# Altium PCB DRV8801.PcbDoc
Units mm, origin at the board's own origin, x right, y up, seen from the top; angles counter-clockwise.
Board outline 30 x 20 mm, 2 copper layers (Top Layer, Bottom Layer); 12 components, 16 nets, 44 pads, 6 vias.
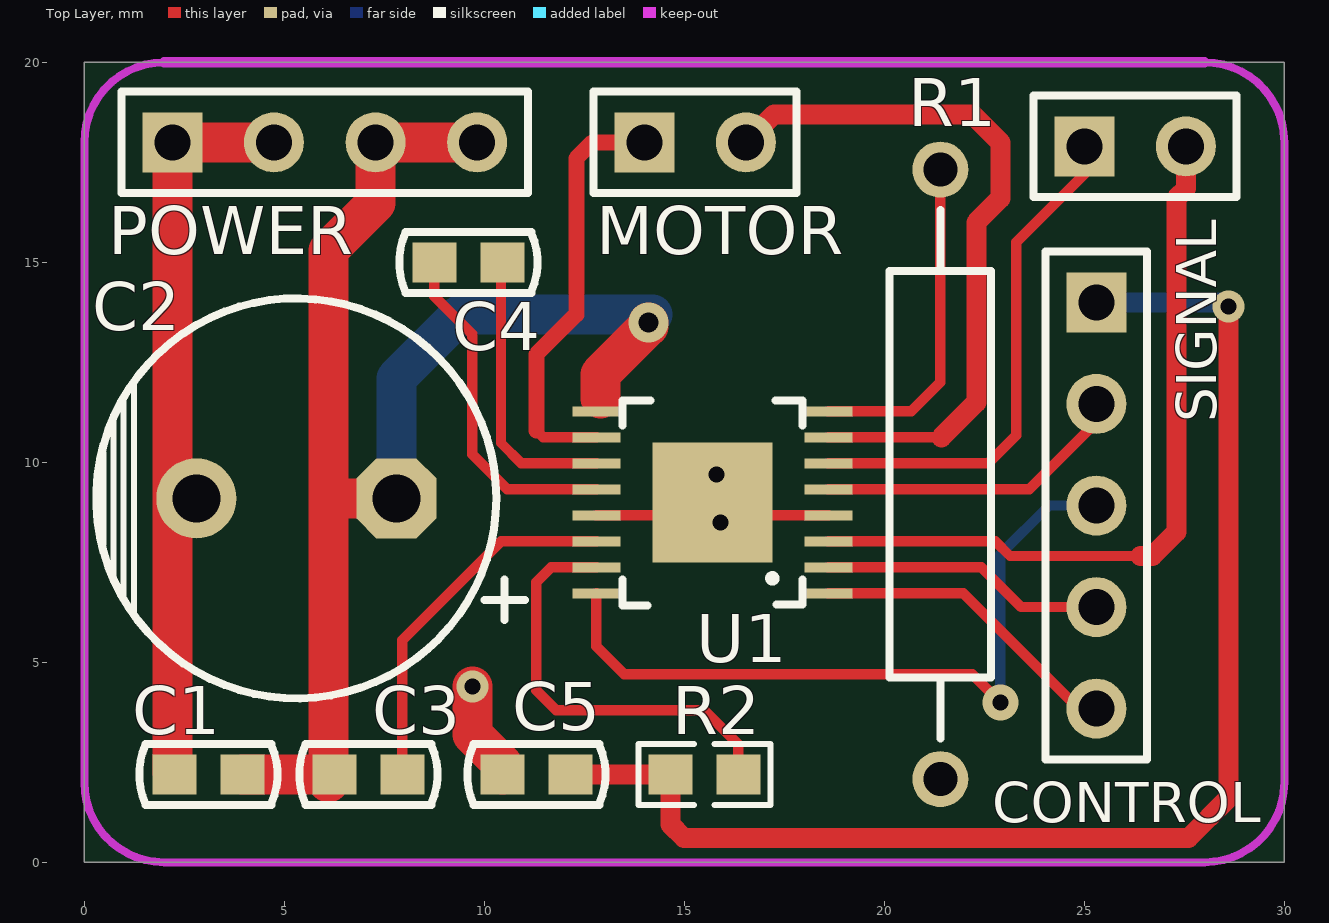
[diagram p0: Top Layer view]
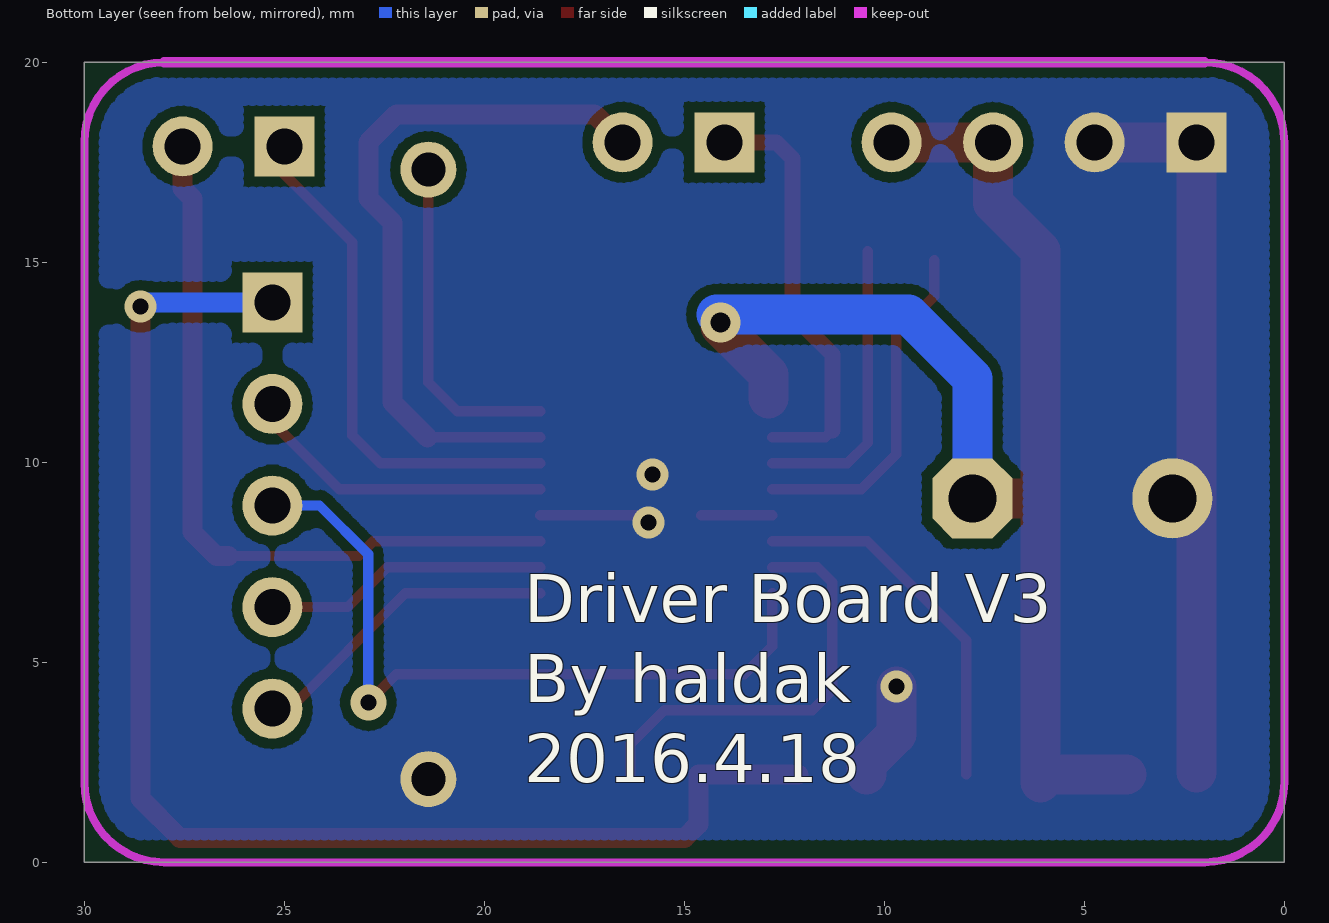
[diagram p1: Bottom Layer view, seen from below]
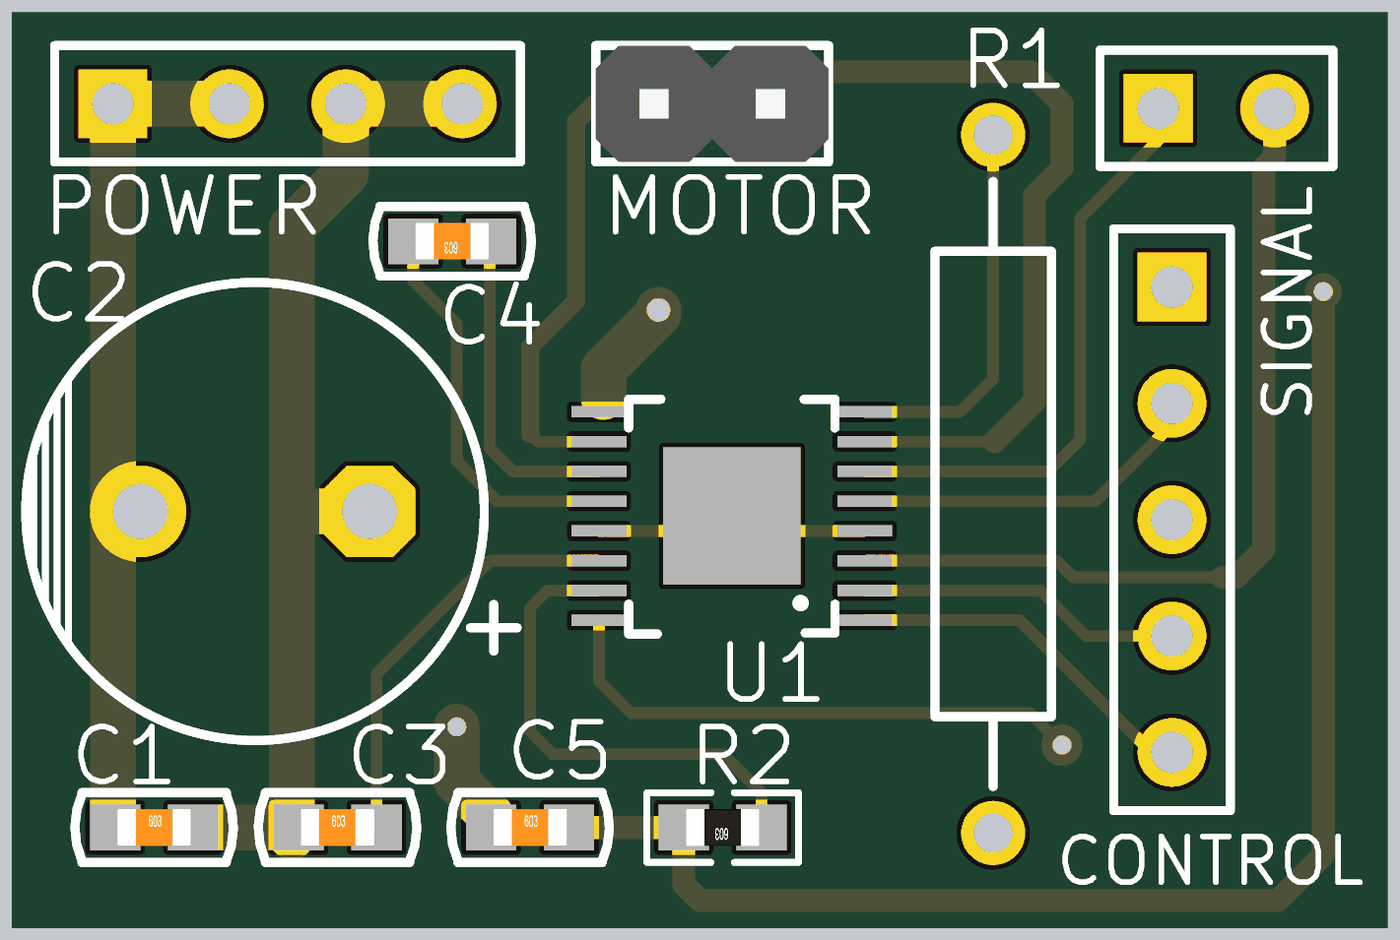
[diagram p2: 3D render of the assembled board from above, using the file's embedded part models]

## Layer stack, top to bottom
Top Solder: solder mask 0.0102, Solder Resist, Dk 3.5
Top Layer: signal copper 0.0356
Dielectric1: dielectric 0.32, FR-4, Dk 4.8
Bottom Layer: signal copper 0.0356
Bottom Solder: solder mask 0.0102, Solder Resist, Dk 3.5

## Board outline
0,0 0,20 30,20 30,0 0,0

## Design rules (kind name [scope] priority, off if disabled: settings)
Clearance Clearance_1 [All] p1: gap=0.254
Clearance [All] p2 off: gap=0.6
FabricationTestpoint [(IsPad And (OnTopLayer Or OnBottomLayer))] p1: side=3 testpointundercomponent=TRUE minsize=1.016 maxsize=2.54 preferedsize=1.524 minholesize=0 maxholesize=1.016 preferedholesize=0.813 testpointgrid=0.025 allowsidetop=TRUE allowsidebottom=TRUE usegrid=TRUE gridtolerance=0
HoleSize [All] p1: absolutevalues=TRUE maxlimit=4 minlimit=0.025 maxpercent=80.000 minpercent=20.000
PolygonConnect [All] p1: connectstyle=Direct reliefconductorwidth=0.254 reliefentries=4 polygonreliefangle="90 Angle" airgapwidth=0.254
RoutingVias [All] p1: holewidth=0.4 width=0.8 viastyle="Through Hole" minholewidth=0.1 minwidth=0.1 maxholewidth=0.711 maxwidth=1.27
SolderMaskExpansion [All] p1: expansion=0.102
Width [All] p1: maxlimit=6 minlimit=0.254 preferedwidth=1
28 further rules are at their usual default settings.

## Components (designator, comment, footprint, x,y, rotation, side; value= is the part's Value field where it differs from the comment)
C1 "Cap-S" C-0603 3.1,2.2 r0 top
C2 "Cap-Pol-ER" C-RB-5.0/10 5.3,9.1 r180 top
C3 "Cap-S" C-0603 7.1,2.2 r0 top
C4 "Cap-S" C-0603 9.6,15 r180 top
C5 "Cap-S" C-0603 11.3,2.2 r0 top
CONTROL "Header 5" HDR1X5 25.3,14 r270 top
MOTOR "Header 2" HDR2X1-2.54 14,18 r0 top
POWER "Header 4" HDR1X4 2.2,18 r0 top
R1 "Res Adj2" AXIAL-0.6 21.4,9.7 r90 top
R2 "Res1" 0603-1 15.5,2.2 r180 top
SIGNAL "Header 2" HDR1X2 25,17.9 r0 top
U1 "DRV8801" HTSSOP16 15.7,9 r180 top

## Footprints (in the part's own frame and the unit in brackets; to place one, negate y for a bottom-side part, rotate by r counter-clockwise, add the part's x,y. Pads: shape width x height; smd on the part's side, far side on the other; paste and mask are expansions set on the pad)
0603-1 [mm] "0603带丝印"
  rect 1.1x1 smd: 1(-0.85,0) 2(0.85,0)
  silkscreen extent -1.65,-0.76 1.65,0.76, body extent -0.8,-0.4 0.8,0.4, height 0.3
AXIAL-0.6 [mm] "Axial Device, Thru-Hole; 2 Leads; 0.6 in Pin Spacing"
  round 1.4 hole 0.85: 1(-7.62,0) 2(7.62,0)
  silkscreen extent -6.6,-1.27 6.6,1.27
C-0603 [mm] "贴片电容"
  rect 1.1x1 smd: 1(-0.85,0) 2(0.85,0)
  silkscreen extent -1.73,-0.76 1.73,0.76, body extent -0.8,-0.4 0.8,0.4, height 0.3
C-RB-5.0/10 [mm] "插件电解电容"
  oct 2x2 hole 1.2: 1(-2.5,0)
  round 2 hole 1.2: 2(2.5,0)
  silkscreen extent -5.71,-5 5,5
HDR1X2 [mm] "Connector; Header; 2 Position"
  rect 1.5x1.5 hole 0.9: 1(0,0)
  round 1.5 hole 0.9: 2(2.54,0)
  silkscreen extent -1.27,-1.27 3.81,1.27
HDR1X4 [mm] "Connector; Header; 4 Position"
  rect 1.5x1.5 hole 0.9: 1(0,0)
  round 1.5 hole 0.9: 2(2.54,0) 3(5.08,0) 4(7.62,0)
  silkscreen extent -1.27,-1.27 8.89,1.27
HDR1X5 [mm] "Connector; Header; 5 Position"
  rect 1.5x1.5 hole 0.9: 1(0,0)
  round 1.5 hole 0.9: 2(2.54,0) 3(5.08,0) 4(7.62,0) 5(10.16,0)
  silkscreen extent -1.27,-1.27 11.43,1.27
HDR2X1-2.54 [mm] "2.54单排针排座"
  rect 1.5x1.5 hole 0.9: 1(0,0)
  round 1.5 hole 0.9: 2(2.54,0)
  silkscreen extent -1.27,-1.27 3.81,1.27, body extent -1.27,-1.27 3.81,1.27, height 8.54
HTSSOP16 [mm]
  rect 3x3 smd paste+0 mask+0.1: 0(0,0)
  rect 1.2x0.25 smd paste+0 mask+0.1: 1(-2.9,2.275) 2(-2.9,1.625) 3(-2.9,0.975) 4(-2.9,0.325) 5(-2.9,-0.325) 6(-2.9,-0.975) 7(-2.9,-1.625) 8(-2.9,-2.275) 9(2.9,-2.275) 10(2.9,-1.625) 11(2.9,-0.975) 12(2.9,-0.325) 13(2.9,0.325) 14(2.9,0.975) 15(2.9,1.625) 16(2.9,2.275)
  silkscreen extent -2.25,-2.55 2.25,2.58

## Part data
C1 C3 C4 C5: "贴片瓷片电容"
C2: "插件电解电容"
CONTROL: "Header, 5-Pin"
MOTOR: "接插件"
POWER: "Header, 4-Pin"
R1: "Variable Resistor"
R2: "贴片电阻"
SIGNAL: "Header, 2-Pin"

## Via types
v1: diameter 0.8, hole 0.4, Top Layer to Bottom Layer, tented both sides, 4 vias
v2: diameter 1, hole 0.5, Top Layer to Bottom Layer, tented both sides, 1 vias
v3: diameter 0.9, hole 0.4, Top Layer to Bottom Layer, tented both sides, 1 vias

## Nets (pads, with @x,y where several pads share a name; then routed paths per layer and width w, separated by ;. In a path a pad name is that pad's centre, name@x,y a point inside that pad or via, vN(x,y) a via of type N, cw(c..) or ccw(c..) an arc to the next point about the centre after c; other vN are vias at no path point)
ENABLE: SIGNAL.1 U1.6 | length 12.9
  Top Layer w0.254: U1.6 22.6,9.975 23.3,10.675 23.3,15.5 25,17.2 SIGNAL.1
GND: C1.1 C2.2 C5.1 POWER.1 POWER.2 R1.1 U1.0 U1.4 U1.13 | length 25.2
  Top Layer w0.254: U1.13 U1.0@14.575,8.675 ; U1.0@16.025,8.675 U1.4
  Top Layer w1: C1.1@2.2,2.25 POWER.1 POWER.2 ; v1(9.7,4.4) 9.7,3.2 10.45,2.45 C5.1
  other v1: 15.9,8.5 15.8,9.7
MODE1: CONTROL.4 U1.2 | length 7.1
  Top Layer w0.254: U1.2 22.425,7.375 23.42,6.38 CONTROL.4
MODE2: CONTROL.3 U1.16 | length 18.6
  Top Layer w0.254: U1.16 12.8,5.4 13.5,4.7 22.2,4.7 v3(22.9,4)
  Bottom Layer w0.254: v3(22.9,4) 22.9,7.7 24.12,8.92 CONTROL.3
NetC3_2: C3.2 U1.14 | length 9.2
  Top Layer w0.254: C3.2 7.95,5.55 10.425,8.025 U1.14
NetC4_1: C4.1 U1.11 | length 7.4
  Top Layer w0.254: C4.1@10.416,15.284 10.416,10.484 10.925,9.975 U1.11
NetC4_2: C4.2 U1.12 | length 8.7
  Top Layer w0.254: C4.2@8.75,15.05 8.75,14.15 9.7,13.2 9.7,10.2 10.575,9.325 U1.12
NetMOTOR_1: MOTOR.1 U1.10 | length 10.7
  Top Layer w0.254: 11.3,10.8 11.475,10.625 U1.10
  Top Layer w0.4: 11.3,10.8 11.3,12.7 12.3,13.7 12.3,17.6 12.7,18 MOTOR.1
NetMOTOR_2: MOTOR.2 U1.7 | length 17.8
  Top Layer w0.254: U1.7 21.425,10.625
  Top Layer w0.5: MOTOR.2 17.24,18.7 22.2,18.7 22.9,18 22.9,16.6 22.3,16 22.3,11.5 21.425,10.625
NetR1_2: R1.2 U1.8 | length 7.8
  Top Layer w0.254: U1.8 20.675,11.275 21.4,12 R1.2@21.4,16.72
NetR2_1: R2.1 U1.15 | length 10.7
  Top Layer w0.254: U1.15 11.675,7.375 11.3,7 11.3,4.3 11.8,3.8 15.5,3.8 16.35,2.95 R2.1
NFAULT: CONTROL.5 U1.1 | length 7.9
  Top Layer w0.254: U1.1 21.975,6.725 24.86,3.84 CONTROL.5
NSLEEP: CONTROL.2 U1.5 | length 7.9
  Top Layer w0.254: U1.5 23.625,9.325 25.3,11 CONTROL.2
PHASE: SIGNAL.2 U1.3 | length 18.8
  Top Layer w0.254: U1.3 22.775,8.025 23.14,7.66 26.4,7.66
  Top Layer w0.5: 26.4,7.66 26.7,7.66 27.3,8.26 27.3,16.6 27.54,16.84 SIGNAL.2
VCC_11V: C1.2 C2.1 C3.1 POWER.3 POWER.4 U1.9 | length 35.1
  Top Layer w1: C1.2 C3.1@6,2.2 ; C3.1@6.1,2 6.1,15.3 7.28,16.48 POWER.3 POWER.4 ; 6.2,9.1 C2.1 ; 12.9,11.6 12.9,12.2 14.1,13.4 v2(14.1,13.5)
  Bottom Layer w1: C2.1 7.8,12.1 9.4,13.7 v2@14.2,13.7
VPROPI: C5.2 CONTROL.1 R2.2 | length 33.8
  Top Layer w0.5: C5.2 R2.2 14.65,0.95 14.994,0.606 27.606,0.606 28.6,1.6 v1(28.6,13.9)
  Bottom Layer w0.5: CONTROL.1 v1@28.5,14

## Polygon pours and split planes (outlines as drawn)
GND on Bottom Layer "TopLayer-GND" (hatched 90Degree grid 0.2 track 0.5, remove dead copper, pour order 1000): 0.7,19.7 0.6,19.6 0.6,0.8 29.3,0.8 29.4,0.9 29.6,1.1 29.6,19.6 0.8,19.6 0.7,19.7

## Keep-outs
Keep-Out Layer:
  lines w0.2: 0,2 ccw(c2,2) 2,0 ; 0,18 cw(c2,18) 2,20 ; 28,0 ccw(c28,2) 30,2 ; 28,20 cw(c28,18) 30,18
  lines w0.203: 0,2 0,18 ; 2,0 28,0 ; 30,2 30,18
  lines w0.254: 2,20 28,20

## Silkscreen, mask and mechanical layers (free items; w line width, h text height)
Bottom Overlay:
  text "Driver Board V3" at 19,6 h1.2
  text "By haldak" at 19,4 h1.2
  text "2016.4.18" at 19,2 h1.2